# Altium PCB PCB1.PcbDoc
Units mil, origin at the board's own origin, x right, y up, seen from the top; angles counter-clockwise.
Board outline 6000 x 4000 mil, 2 copper layers (Top Layer, Bottom Layer); 71 components, 53 nets, 274 pads, 237 vias.
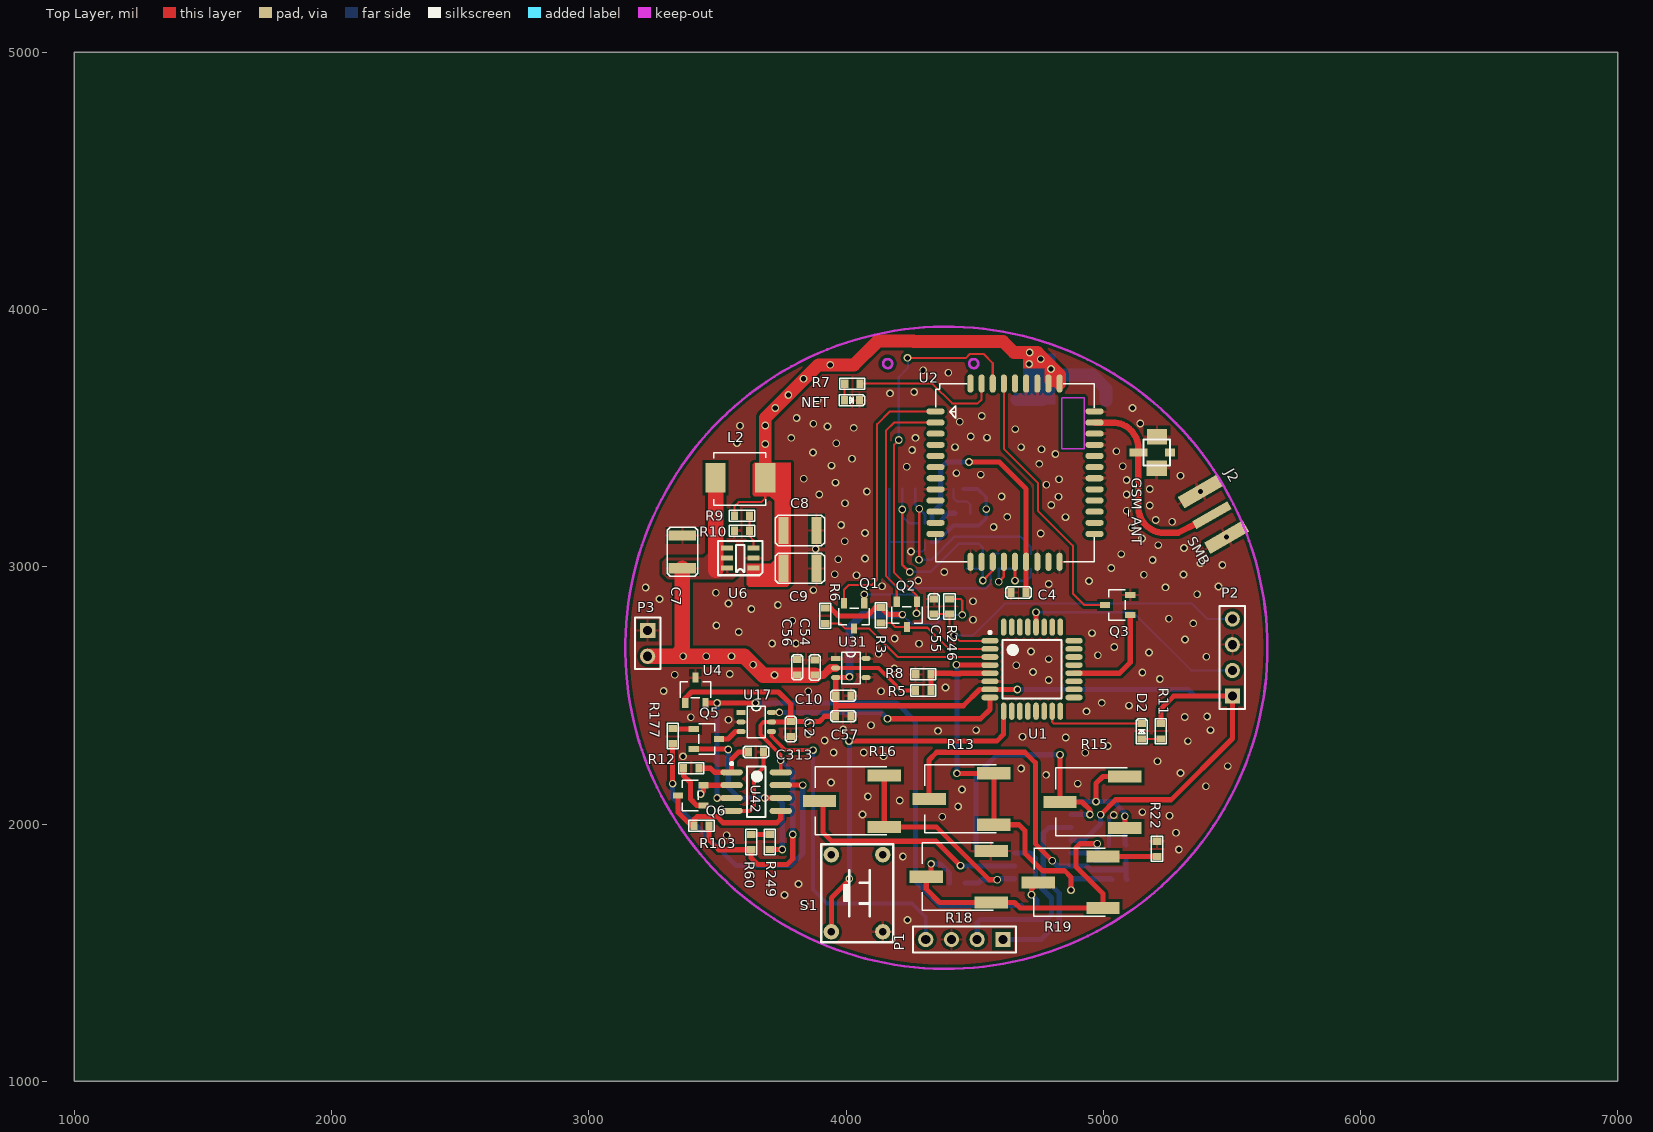
[diagram p0: Top Layer view]
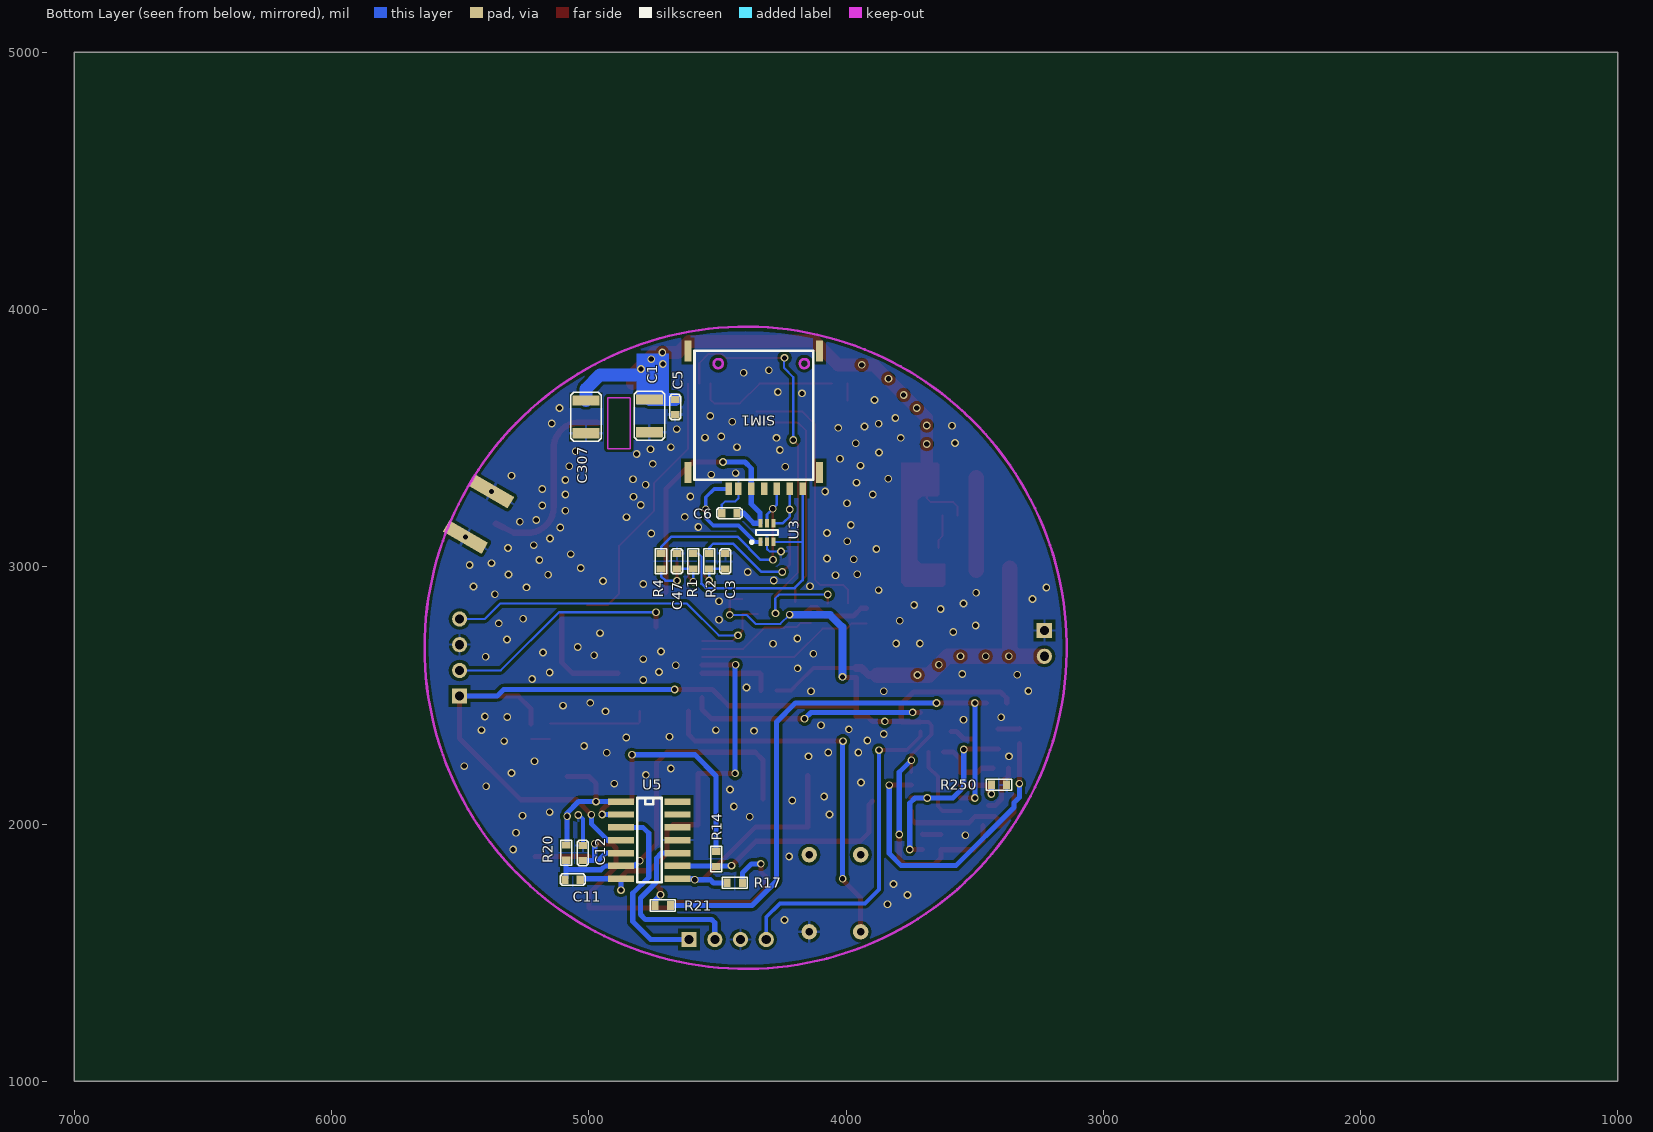
[diagram p1: Bottom Layer view, seen from below]

## Layer stack, top to bottom
Top Layer: signal copper 1.4
Dielectric: dielectric 12.6, FR-4, Dk 4.8
Bottom Layer: signal copper 1.4

## Board outline
1000,1000 7000,1000 7000,5000 1000,5000

## Design rules (kind name [scope] priority, off if disabled: settings)
Clearance [InPoly] p1: gap=12
Clearance Clearance_1 [All] p2: gap=10
PolygonConnect [IsVia] p1: connectstyle=Direct reliefconductorwidth=10 reliefentries=4 polygonreliefangle="90 Angle"
RoutingVias [All] p1: holewidth=28 width=50 viastyle="Through Hole" minholewidth=28 minwidth=50 maxholewidth=28 maxwidth=50
SilkscreenOverComponentPads [All] p1: minsilkscreentomaskgap=10
SolderMaskExpansion [All] p1: expansion=4
Width [All] p1: maxlimit=200 minlimit=5 preferedwidth=10
27 further rules are at their usual default settings.

## Classes and differential pairs
component class GPRS: C1 C3 C4 C5 C6 C47 C307 GSM_ANT J2 NET Q1 Q2 Q3 R1 R2 R3 R4 R6 R7 SIM1 U2 U3
component class MCU: C55 D2 P2 R5 R8 R11 R246 S1 U1
component class power: C2 C7 C8 C9 C10 C11 C12 C54 C56 C57 C313 L2 P1 P3 Q5 Q6 R9 R10 R12 R13 R14 R15 R16 R17 R18 R19 R20 R21 R22 R60 R103 R177 R249 R250 U4 U5 U6 U17 U31 U42

## Components (designator, comment, footprint, x,y, rotation, side; value= is the part's Value field where it differs from the comment)
C1 "47uF/10V" 1210C 4764,3523 r90 bottom
C2 "0.1uF" 0603C 3785,2399 r270 top
C3 "33pF/10V" 0603C 4469,2991.94 r90 bottom
C4 "220nF/10V" 0603C 4641,2900 r0 top
C5 "0.1uF/10V" 0603C 4664,3650 r270 bottom
C6 "33pF/10V" 0603C 4483,3208 r180 bottom
C7 "47uF/10V" 1210C 3364,3122 r270 top
C8 "47uF/10V" 1210C 3885,3141 r180 top
C9 "47uF/10V" 1210C 3885,2994 r180 top
C10 "0.1uF/10V" 0603C 3960,2499 r0 top
C11 "0.1uF" 0603C 5092,1784 r180 bottom
C12 "0.1uF" 0603C 5023,1917 r270 bottom
C47 "33pF/10V" 0603C 4657,2992 r90 bottom
C54 "0.1uF/10V" 0603C 3878,2579 r90 top
C55 "0.1uF/10V" 0603C 4341.35,2816 r90 top
C56 "10uF/10V" 0603C 3811,2639 r270 top
C57 "10uF/10V" 0603C 4019,2419 r180 top
C307 "47uF/10V" 1210C 5011,3519 r90 bottom
C313 "0.1uF" 0603C 3620,2280 r0 top
D2 "LED0" 0603LED 5150,2331 r90 top
GSM_ANT "IPX" IPX 5209,3495 r90 top
J2 "SMB" "SMA END LAUNCH JACK RECEPTACLE SHORT" 5422,3200 r300 top
L2 "IHLP-2020ABER4R7M01" IHLP2020 3686,3346 r180 top
NET "LED" 0603LED 3994,3647 r0 top
P1 "Header 4" HDR1X4 4610,1551 r180 top
P2 "Header 4" HDR1X4 5502,2497 r90 top
P3 "Header 2" HDR1X2 3229,2752 r270 top
Q1 "SI2306" SOT23-3 4071,2858 r90 top
Q2 "SI2306" SOT23-3 4276,2864 r90 top
Q3 "SI2306" SOT23-3 5105,2812 r0 top
Q5 "MMBT9015" SOT23-3 3408,2370 r180 top
Q6 "MMBT9013L" SOT23-3 3446,2072 r0 top
R1 "10R/5%" 0603R 4594,3051 r270 bottom
R2 "10R/5%" 0603R 4531.5,3051 r270 bottom
R3 "10K" 0603R 4136,2841 r270 top
R4 "10R/5%" 0603R 4719,3051 r270 bottom
R5 "10K" 0603R 4330,2519 r180 top
R6 "10K" 0603R 3920,2839 r270 top
R7 "1K" 0603r 3995,3712 r0 top
R8 "10K" 0603R 4271,2582 r0 top
R9 "51.1K/1%" 0603R 3625,3199 r180 top
R10 "10K/1%" 0603R 3566,3140 r0 top
R11 "1K" 0603R 5224,2390 r270 top
R12 "1K" 0603R 3428,2217 r180 top
R13 "200K" SMD_RESISTOR 4323,2097 r90 top
R14 "10K" 0603R 4505,1894 r270 bottom
R15 "200K" SMD_RESISTOR 4832,2085 r90 top
R16 "200K" SMD_RESISTOR 3897,2089 r90 top
R17 "100K" 0603R 4462,1771 r180 bottom
R18 "200K" SMD_RESISTOR 4312,1795 r90 top
R19 "200K" SMD_RESISTOR 4747,1773 r90 top
R20 "100K" 0603R 5088,1918 r270 bottom
R21 "100K" 0603R 4683,1683 r0 bottom
R22 "100K" 0603R 5209,1874 r90 top
R60 "100/1%" 0603R 3631,1900 r90 top
R103 "10K/1%" 0603R 3409,1993 r0 top
R177 "1K" 0603R 3326,2312 r90 top
R246 "10K" 0603R 4402.35,2816 r90 top
R249 "1.21K/1.25K/1%" 0603R 3703,1960 r270 top
R250 "10K/1%" 0603R 3376,2152 r0 bottom
S1 "SW-PB" key 3943,1581 r0 top
SIM1 "nano sim" "Nano SIM" 4456,3303 r0 bottom
U1 "STM8L151G4U6" QFP80P900X900X245-32N 4723,2602 r0 top
U2 "SIM800C" SIM800C 4348,3604 r0 top
U3 "SMF05C" SC70-6L 4307,3133 r90 bottom
U4 "REF3012AIDBZR" SOT23-3 3375,2471 r270 top
U5 "max4164" SO-14 4875,2087 r180 bottom
U6 "SS6640STR" SOT-23-6 3589,3034 r180 top
U17 "SN74LVC1G3157DBVR" SOT23-6(DBV) 3592,2434 r0 top
U31 "TLV70430DBVT" SOT23-5(DBV) 3960,2644 r0 top
U42 "LM2904AVQDR" SOP127P600-8N 3651,2126 r0 top

## Footprints (in the part's own frame and the unit in brackets; to place one, negate y for a bottom-side part, rotate by r counter-clockwise, add the part's x,y. Pads: shape width x height; smd on the part's side, far side on the other; paste and mask are expansions set on the pad)
0603C [mm]
  rect 0.7x0.85 smd: 1(0,0) 2(1.5,0)
  silkscreen extent -0.5,-0.55 2,0.55
0603LED [mm]
  rect 0.7x0.85 smd: 1(0,0) 2(1.5,0)
  silkscreen extent -0.5,-0.55 2,0.55
0603R [mm]
  rect 0.7x0.85 smd: 1(0,0) 2(1.5,0)
  silkscreen extent -0.5,-0.55 2,0.55
0603r [mm]
  rect 0.7x0.85 smd: 1(0,0) 2(1.5,0)
  silkscreen extent -0.5,-0.55 2,0.55
1210C [mm]
  rect 1x2.7 smd: 1(0,0) 2(3.25,0)
  silkscreen extent -0.8,-1.5 4.05,1.5
HDR1X2 [mm] "Connector; Header; 2 Position"
  rect 1.5x1.5 hole 0.9: 1(0,0)
  round 1.5 hole 0.9: 2(2.54,0)
  silkscreen extent -1.27,-1.27 3.81,1.27
HDR1X4 [mm] "Connector; Header; 4 Position"
  rect 1.5x1.5 hole 0.9: 1(0,0)
  round 1.5 hole 0.9: 2(2.54,0) 3(5.08,0) 4(7.62,0)
  silkscreen extent -1.27,-1.27 8.89,1.27
IHLP2020 [mm]
  rect 2x2.9 smd: 1(0,0) 2(4.9,0)
  silkscreen extent -0.07,-2.46 5.11,2.72
IPX [mil]
  rect 60x78.74 smd: 1(10.36,0) 3(-112,1)
  rect 31.5x70 smd: 2(-51,72.36)
  rect 31.5x39.37 smd: ""(-51,-50)
  silkscreen extent -102,-50 0,52
key [mil]
  round 60 hole 30: 1(0,0) 2(200,0) 3(0,300) 4(200,300)
  silkscreen extent -40,-40 240,340
"Nano SIM" [mm]
  rect 0.7x2.1 smd: 0(-8.97,-13.615) 0(-8.97,-1.615) 0(4.02,-13.615) 0(4.02,-1.615)
  rect 0.65x1.23 smd: 1(-2.22,0) 2(-4.76,0) 3(-7.3,0) 5(-0.95,0) 6(-3.49,0) 7(-6.03,0) 8(0,0)
  Keep-Out Layer circle w0.254: c-7.47,-12.365 r0.45
  Keep-Out Layer circle w0.254: c1.03,-12.365 r0.45
  silkscreen extent -8.33,-13.64 3.38,-0.91
QFP80P900X900X245-32N [mm] "QFP, 32-Leads, Body 9.2x9.2mm (max), Pitch 0.80mm, IPC Medium Density"
  oval 1.7x0.55 smd: 1(-4.15,2.8) 2(-4.15,2) 3(-4.15,1.2) 4(-4.15,0.4) 5(-4.15,-0.4) 6(-4.15,-1.2) 7(-4.15,-2) 8(-4.15,-2.8) 17(4.15,-2.8) 18(4.15,-2) 19(4.15,-1.2) 20(4.15,-0.4) 21(4.15,0.4) 22(4.15,1.2) 23(4.15,2) 24(4.15,2.8)
  oval 0.55x1.7 smd: 9(-2.8,-4.15) 10(-2,-4.15) 11(-1.2,-4.15) 12(-0.4,-4.15) 13(0.4,-4.15) 14(1.2,-4.15) 15(2,-4.15) 16(2.8,-4.15) 25(2.8,4.15) 26(2,4.15) 27(1.2,4.15) 28(0.4,4.15) 29(-0.4,4.15) 30(-1.2,4.15) 31(-2,4.15) 32(-2.8,4.15)
  silkscreen extent -4.27,-2.9 2.9,3.75, body extent -3.5,-3.5 3.5,3.5, height 2.45
SC70-6L [mm]
  rect 0.85x0.4 smd: 1(-0.925,0.65) 2(-0.925,0) 3(-0.925,-0.65) 4(0.925,-0.65) 5(0.925,0) 6(0.925,0.65)
  silkscreen extent -1.09,-1.1 0.25,1.65
SIM800C [mm]
  oval 1.8x0.6 smd: 1(0,0) 2(0,-1.1) 3(0,-2.2) 4(0,-3.3) 5(0,-4.4) 6(0,-5.5) 7(0,-6.6) 8(0,-7.7) 9(0,-8.8) 10(0,-9.9) 11(0,-11) 12(0,-12.1) 22(15.7,-12.1) 23(15.7,-11) 24(15.7,-9.9) 25(15.7,-8.8) 26(15.7,-7.7) 27(15.7,-6.6) 28(15.7,-5.5) 29(15.7,-4.4) 30(15.7,-3.3) 31(15.7,-2.2) 32(15.7,-1.1) 33(15.7,0)
  oval 0.6x1.8 smd: 13(3.45,-14.85) 14(4.55,-14.85) 15(5.65,-14.85) 16(6.75,-14.85) 17(7.85,-14.85) 18(8.95,-14.85) 19(10.05,-14.85) 20(11.15,-14.85) 21(12.25,-14.85) 34(12.25,2.75) 35(11.15,2.75) 36(10.05,2.75) 37(8.95,2.75) 38(7.85,2.75) 39(6.75,2.75) 40(5.65,2.75) 41(4.55,2.75) 42(3.45,2.75)
  Keep-Out Layer lines w0.127: 12.471,1.372 12.471,-3.683 14.681,-3.683 14.681,1.346 12.522,1.346
  silkscreen extent 0,-14.86 15.7,2.74
"SMA END LAUNCH JACK RECEPTACLE SHORT" [mm] "SMA Connector - End Launch Jack Receptacle - Short"
  rrect10% 0.9x4 smd paste+0 mask+0.05: 1(0,0)
  rrect10% 1.3x4.4 hole 0.5 mask+0.05: 2(-2.6,0.2) 2(2.6,0.2)
  body extent -0.5,-2.05 0.5,2.05, height 8
SMD_RESISTOR [mm]
  rect 1.2x3.3 smd: 1(2.54,-6.4) 2(0,0) 3(-2.54,-6.4)
  silkscreen extent -3.33,-6.63 3.37,0.41
SO-14 [mil]
  rect 100x25 smd: 1(0,0) 2(0,-50) 3(0,-100) 4(0,-150) 5(0,-200) 6(0,-250) 7(0,-300) 8(220,-300) 9(220,-250) 10(220,-200) 11(220,-150) 12(220,-100) 13(220,-50) 14(220,0)
  silkscreen extent 63,-314 158,14
SOP127P600-8N [mm]
  oval 2.2x0.6 smd: 1(-2.425,1.905) 2(-2.425,0.635) 3(-2.425,-0.635) 4(-2.425,-1.905) 5(2.425,-1.905) 6(2.425,-0.635) 7(2.425,0.635) 8(2.425,1.905)
  silkscreen extent -2.55,-2.5 0.93,2.88
SOT23-3 [mm]
  rect 1x0.6 smd: 1(0,0) 2(0,2) 3(-2.5,1)
  silkscreen extent -2.1,-0.5 -0.5,2.5
SOT23-5(DBV) [mm]
  rect 0.9x0.5 smd: 1(0,0)
  oval 0.9x0.5 smd: 2(0,-0.95) 3(0,-1.9) 4(3,-1.9) 5(3,0)
  silkscreen extent 0.6,-2.5 2.4,0.6
SOT23-6(DBV) [mm]
  rect 0.9x0.5 smd: 1(0,0)
  oval 0.9x0.5 smd: 2(0,-0.95) 3(0,-1.9) 4(3,-1.9) 5(3,-0.95) 6(3,0)
  silkscreen extent 0.6,-2.5 2.4,0.6
SOT-23-6 [mm]
  rect 1.2x0.5 smd: 1(-1.3,1) 2(-1.3,0) 3(-1.3,-1) 4(1.3,-1) 5(1.3,0) 6(1.3,1)
  silkscreen extent -2.2,-1.7 2.2,1.7

## Part data
C1 C7 C8 C9 C307: library part C, "C"
C2 C11 C12 C313: library part CAP, "Capacitor"
C3 C4 C5 C6 C10 C47 C54 C55 C56 C57: library part Cap, "Capacitor"
D2: "Typical INFRARED GaAs LED"
GSM_ANT: library part IPEX, "IPEX座"
J2: "SMB Straight Connector"
L2: library part L, "L"
NET: library part LED2, "Typical RED, GREEN, YELLOW, AMBER GaAs LED"
P1 P2: "Header, 4-Pin"
P3: "Header, 2-Pin"
Q1 Q2 Q3: library part BUK92150-55A, "BUK92150-55A"
Q5: library part PNP
Q6: library part NPN
R1 R2 R3 R4 R6 R11: library part Res2, "Resistor"
R5 R8 R9 R10 R12 R14 R17 R20 R21 R22 R60 R103 R177 R246 R249 R250: library part R, "R"
R7: library part R
R13 R15 R16 R18 R19: library part RPot, "Potentiometer"
S1: "Switch"
U4: library part REF3012
U31: library part TPS76318
U42: library part LM2904D, "Dual Operational Amplifier"

## Via types
v1: diameter 30, hole 20, Top Layer to Bottom Layer, tented both sides, 237 vias

## Nets (pads, with @x,y where several pads share a name; then routed paths per layer and width w, separated by ;. In a path a pad name is that pad's centre, name@x,y a point inside that pad or via, vN(x,y) a via of type N, cw(c..) or ccw(c..) an arc to the next point about the centre after c; other vN are vias at no path point)
1.25V_REF1: R21.1 U4.2 U42.3 | length 2343.8
  Top Layer w20: U4.2 3498,2471 v1(3499,2470) v1(3648,2470) ; v1(3499,2101) U42.3
  Bottom Layer w20: v1(3499,2101) v1(3499,2470) ; v1(3648,2470) 4197,2470 4270,2397 4270,1778 4365,1683 R21.1
CURR_EN1: U1.8 U17.6 | length 921.2
  Top Layer w20: U17.6 v1(3741,2434) ; v1(4161,2409) 4523,2409 4559.61,2445.61 U1.8
  Bottom Layer w20: v1(3741,2434) 4136,2434 v1(4161,2409)
GND: C1.1 C2.2 C3.2 C4.1 C5.2 C6.1 C7.1 C8.1 C9.1 C10.2 C12.1 C47.2 C54.2 C55.2 C56.1 C57.1 C307.1 C313.2 GSM_ANT.1 GSM_ANT.3 J2.2 NET.2 P1.3 P2.3 P3.1 Q3.2 R8.1 R10.1 R18.1 R22.2 R250.1 S1.2 SIM1.5 U1.6 U2.8 U2.13 U2.19 U2.21 U2.27 U2.30 U2.31 U2.33 U2.36 U2.37 U3.2 U4.3 U5.11 U6.2 U17.2 U31.1 U31.4 U31.5 U42.4 | length 678.9
  Top Layer w15: U42.4 3625,2051 3643,2069 3643,2184 3679.06,2220.06 C313.2
  Bottom Layer w8: v1(4253,3059) 4297,3059 4307,3069 U3.2 ; SIM1.5 4418.6,3265.4 4430,3254 4470,3254 4483,3241 C6.1
  Bottom Layer w15: C12.1 5023,2020 5038,2035 v1(5041,2035)
  other v1: 4239,1627 3839,1688 3761,1724 3815,1767 4221,1874 5294,1901 3536,1956 5283,1966 4374,2028 5258,2032 4064,2037 5152,2046 4436,2068 4209,2091 4085,2107 4451,2134 5399,2147 4901,2157 3942,2161 4778,2191 5300,2198 4681,2216 5484,2225 5211,2244 3366,2263 4146,2263 4930,2277 3952,2278 4069,2278 5018,2303 5329,2322 3917,2325 4854,2336 4686,2339 3853,2350 4358,2362 4506,2365 5417,2365 3989,2368 4097,2384 3543,2405 3397,2415 5317,2416 5404,2418 4935,2438 5100,2460 4994,2471 3853,2516 4136,2516 3291,2517 4387,2531 4788,2560 5220,2564 3334,2580 3548,2583 5152,2589 4727,2591 4188,2605 4662,2617 4788,2641 5401,2650 4979,2656 4127,2662 5178,2667 4719,2671 5043,2688 4284,2701 3713,2702 3805,2702 5318,2717 4189,2721 4956,2742 3583,2746 3496,2772 5350,2780 3791,2790 4494,2794 5255,2798 3632,2836 3735,2851 3543,2857 4494,2866 3275,2875 5365,2893 3494,2899 3873,2909 3221,2919 5242,2920 5448,2923 4140,2924 4788,2933 4945,2945 4281,2947 4041,2967 5158,2969 5312,2970 3956,2971 4382,2980 5031,2995 5463,3007 5378,3014 5192,3026 3970,3029 4074,3032 5070,3049 3882,3069 5314,3073 5214,3084 3995,3099 5151,3110 4757,3129 4074,3131 5111,3153 4574,3155 3981,3162 5268,3175 5204,3182 4853,3193 4627,3194 5091,3218 5181,3238 4798,3240 3996,3247 4826,3272 4605,3273 3896,3281 5091,3281 4081,3293 5181,3302 4779,3319 3959,3327 5091,3337 4828,3340 3836,3342 5300,3354 4524,3358 4429,3364 4236,3389 5076,3391 3944,3393 4751,3400 4023,3420 4814,3438 3872,3444 5051,3449 4257,3454 4760,3457 4424,3465 4681,3465 3962,3480 3576,3481 3787,3501 4270,3501 4548,3502 4485,3506 4658,3535 4030,3540 3928,3545 3588,3548 3873,3556 5144,3557 4442,3564 3808,3578 4528,3586 5114,3617 3889,3648 4171,3674 4265,3679 4398,3754 4300,3764
KEY: U1.21
NetC11_1: C11.1 R13.2 R20.2 U5.6 | length 1380.7
  Top Layer w20: R13.2 4323,2249 4353,2279 4695,2279 4736,2238 4736,1923 v1(4802,1857)
  Bottom Layer w20: v1(4802,1857) 4822,1837 U5.6 4938,1837 4953,1822 5086,1822 5088,1824 ; R20.2 5088,1824 ; C11.1 5088,1788 5088,1824
NetC12_2: C12.2 R17.2 R18.2 R18.3 R19.3 U5.5 | length 1542
  Top Layer w20: v1(4331,1845) 4331,1814 R18.2 4312,1747 4364,1695 R18.3 4655,1695 4677,1673 R19.3 4998.97,1729.03 4894,1834 4894,1907 4910,1923 v1(4977,1923)
  Bottom Layer w20: v1(4331,1845) 4368,1845 4402.94,1810.06 R17.2 ; U5.5 4934,1887 4963.06,1857.94 4979,1857.94 ; v1(4977,1923) 4977,1859.94 4979,1857.94 ; C12.2 4979,1857.94
NetC313_1: C313.1 R12.1 U42.1 | length 261.5
  Top Layer w20: R12.1 3473,2217 3489,2201 U42.1 3555.53,2252.53 3583,2280 C313.1
NetD2_1: D2.1 R11.2 | length 74
  Top Layer w8: D2.1 5223.94,2331 R11.2
NetD2_2: D2.2 U1.15 | length 393.2
  Top Layer w8: U1.15 4801.74,2396.26 4807.94,2390.06 D2.2
NetGSM_ANT_2: GSM_ANT.2 J2.1 U2.32 | length 747.3
  Top Layer w25: U2.32 5036.64,3560.69 cw(c5036.64,3460.69) 5136.64,3460.69 GSM_ANT.2 5136.64,3232 ccw(c5236.64,3232) 5236.64,3132 5291,3132 J2.1@5362,3168
NetNET_1: NET.1 R7.1 | length 65.4
  Top Layer w8: NET.1 3995,3648 R7.1
NetQ5_1: Q5.1 R177.2 | length 82.4
  Top Layer w20: R177.2 3327.06,2370 Q5.1
NetQ5_2: Q5.2 R249.2 U42.6 | length 808.2
  Top Layer w20: Q5.2 3540.74,2291.26 v1(3542,2290) ; v1(3684,2101) U42.6 ; R249.2 v1(3752.06,1900.94)
  Bottom Layer w20: v1(3542,2290) 3542,2144 3585,2101 v1(3684,2101) 3732,2101 3752.06,2080.94 v1(3752.06,1900.94)
NetQ5_3: Q5.3 U17.3 | length 97.4
  Top Layer w20: Q5.3 3541.63,2330.63 3570.2,2359.2 U17.3
NetQ6_1: Q6.1 R12.2 | length 192.1
  Top Layer w20: R12.2 3368.94,2187.06 3395,2161 3395,2097 3420,2072 Q6.1
NetQ6_2: Q6.2 R250.2 U42.2 | length 183
  Top Layer w20: v1(3435.06,2116.94) 3446,2127.89 Q6.2 3555.27,2150.74 U42.2
  Bottom Layer w20: v1(3435.06,2116.94) R250.2
NetQ6_3: Q6.3 R103.1 U42.5 | length 563.1
  Top Layer w20: Q6.3 3347.57,2045.19 3399.77,1993 R103.1 3409,2017 3421.73,2029.73 3497.27,2029.73 3522,2005 3731,2005 3746.47,2020.47 U42.5
NetR1_1: R1.1 SIM1.3 U3.3 | length 1023.3
  Bottom Layer w8: 4168.6,3096 4169.18,3096.58 U3.3 ; 4562,2934.57 4562.23,2934.81 4562.23,3040.23 4573,3051 R1.1
  Bottom Layer w10: SIM1.3 4168.6,3096 4168.6,2948.4 4200,2917 4544.43,2917 4562,2934.57
NetR2_1: R2.1 SIM1.7 U3.4 | length 794.7
  Top Layer w10: v1(4218.6,3223) 4218.6,3009.4 v1(4248,2980)
  Bottom Layer w10: SIM1.7 v1(4218.6,3223) 4218.6,3196.4 4245.58,3169.42 U3.4 ; v1(4248,2980) 4329,2980 4439,3090 4516,3090 4531.5,3074.5 R2.1
NetR4_1: R4.1 SIM1.2 U3.5 | length 866.3
  Top Layer w10: v1@4284.7,3023.3 4284.7,3027 v1(4284.7,3225.3)
  Bottom Layer w10: SIM1.2 4268.6,3241.4 v1(4284.7,3225.3) 4307,3203 U3.5 ; v1(4284,3027) 4332,3027 4422,3117 4679,3117 4707,3089 4719,3077 R4.1
NetR7_2: R7.2 U2.41 | length 573.4
  Top Layer w8: R7.2 4336,3712 4413,3635 4512,3635 4527.13,3650.13 U2.41
NetR9_1: R9.1 R10.2 U6.3 | length 131.9
  Top Layer w8: R9.1 3625,3140.06 R10.2 3625.06,3118.94 3640.18,3103.82 U6.3
NetR14_1: R14.1 R15.2 U5.2 | length 1057.4
  Top Layer w20: v1(4832,2269) R15.2 4918,2085 4948,2055 v1(4948,2037)
  Bottom Layer w20: R14.1 4505,2187 4587,2269 v1(4832,2269) ; U5.2 v1(4948,2037)
NetR14_2: R14.2 R16.2 U5.9 | length 925.6
  Top Layer w20: R16.2 3910,2076 3910,1968 3945,1933 4350,1933 v1(4445,1838)
  Bottom Layer w20: v1(4445,1838) 4445.94,1837.06 4502,1837.06 4654.94,1837.06 U5.9
NetR15_1: R15.1 R15.3 R20.1 U5.1 | length 593
  Top Layer w20: v1(4972,2087) 4972,2158 4999,2185 R15.1 ; R15.3 v1(5083.97,2029.97)
  Bottom Layer w20: U5.1 5040,2087 5083.97,2043.03 v1(5083.97,2029.97) 5083.97,1922.03 R20.1
NetR16_1: R16.1 R16.3 R17.1 U5.8 | length 924
  Top Layer w20: R16.1 R16.3 4351,1989 4557,1783 v1(4588,1783)
  Bottom Layer w20: R17.1 4515,1771 4527,1783 v1(4588,1783) 4592,1787 U5.8
NetR19_1: R19.1 R22.1 | length 210.4
  Top Layer w20: R19.1 5208,1873 R22.1
NetR19_2: R19.2 R21.2 | length 109.5
  Top Layer w20: v1(4721,1725) 4721,1747 R19.2
  Bottom Layer w20: v1(4721,1725) 4742.06,1703.94 R21.2
NetR60_2: R60.2 R249.1 | length 72.4
  Top Layer w20: R60.2 3702.06,1959.06 R249.1
NetR177_1: R177.1 U42.7 | length 1206.3
  Top Layer w20: v1(3326,2157) R177.1 ; U42.7 v1(3832,2151)
  Bottom Layer w20: v1(3326,2157) 3326,2103.64 3346.95,2082.69 3346.95,2064.05 3573,1838 3785,1838 3832,1885 v1(3832,2151)
NetS1_1: S1.1 U1.9 | length 1467.1
  Top Layer w20: S1.1 3943,1712 v1@4013,1782 ; v1(4012,2322) 4586,2322 4612.76,2348.76 U1.9
  Bottom Layer w20: v1(4012,2322) 4013,2321 v1(4013,1787)
NetSIM1_8: SIM1.8 U3.1 | length 433.8
  Bottom Layer w15: U3.1 4353.58,3096.58 4418,3161 4516,3161 4545,3190 4545,3270 4512,3303 SIM1.8
  other v1: 4545,3224
OUT+: P1.2 U5.10 | length 702.1
  Bottom Layer w20: P1.2 4510,1616 4523,1629 4780,1629 4798.85,1647.85 4798.85,1685 4798.85,1712.15 4737,1774 4737,1867 4717,1887 U5.10
OUT-: P1.1 U5.3 | length 734.1
  Bottom Layer w20: P1.1 4759,1551 4828.85,1620.85 4828.85,1730.65 4767,1792.5 4767,1879.43 4767,1964 4790,1987 U5.3
P1: P1.4 U17.4 | length 1313.8
  Top Layer w15: U17.4 3710.11,2340.89 3764,2287 v1(3872,2287)
  Bottom Layer w15: v1(3872,2287) 3872,1745 3926,1691 4257,1691 4310,1638 P1.4
PWRKEY: Q3.3 U2.39 | length 1070.4
  Top Layer w8: U2.39 4613.75,3458.25 4746,3326 4746,3218 4882,3082 4882,2896 4926.63,2851.37 Q3.3
PWRKEY_IN: Q3.1 U1.20 | length 419.9
  Top Layer w20: U1.20 5063.25,2586.25 5105,2628 Q3.1
RST: C55.1 P2.4 R246.1 U1.1 | length 1458
  Top Layer w8: C55.1 R246.1 4402.35,2750.65 v1(4419.61,2733.39) 4440.76,2712.24 U1.1
  Bottom Layer w8: v1(4419.61,2733.39) 4495.39,2733.39 4619,2857 5344,2857 5404,2797 P2.4
RXD: Q1.3 R6.2 U1.3 | length 693.8
  Top Layer w8: R6.2 3977.06,2779.94 3997.43,2759.57 Q1.3 4090.43,2759.57 4200.76,2649.24 U1.3
SENSOR_OUT: C11.2 R13.1 R13.3 U1.4 U5.7 | length 1587.2
  Top Layer w20: v1(4429,2619) 4430.25,2617.75 U1.4 ; v1(4431,2197) R13.1 R13.3 4673,1997 4696,1974 4696,1886 4764,1818 4850,1818 4875,1793 v1(4875,1743)
  Bottom Layer w20: v1(4429,2619) 4431,2617 v1(4431,2197) ; v1(4875,1743) U5.7 5029.94,1787 C11.2
SIM800_VBAT: C1.2 C5.1 C8.2 C9.2 C307.2 L2.1 R9.2 U2.34 U2.35 U6.1 | length 2379
  Top Layer w8: R9.2 3565.94,3233.94 3583,3251 3670,3251 3686,3267 L2.1
  Top Layer w50: L2.1 3686,3578 3893,3785 4031,3785 4123,3877 4261.71,3877 4262.71,3876 4610,3876 4653,3833 4744,3833 v1@4797.28,3779.72 ; U2.35@4797.28,3722.57 v1@4797.28,3779.72 ; U2.34 4830.28,3746.72 v1@4797.28,3779.72
  Bottom Layer w50: C5.1 4763.05,3650 C1.2 4764,3707 4802,3745 4957,3745 5011,3691 C307.2
  other v1: 3686,3477 3686,3549 3724.91,3616.91 3775.91,3667.91 3835,3731 4797.28,3769 3939,3785 4712,3788 4757,3807 4714,3833
SIM_RX: Q2.2 U2.2 | length 888
  Top Layer w8: Q2.2 4197.26,2922.74 4155,2965 4155,3528 4187.69,3560.69 U2.2
SIM_TX: Q1.2 U2.1 | length 1049.8
  Top Layer w8: Q1.2 3992.26,2911.26 4010,2929 4100,2929 4121,2950 4121,3554 4171,3604 U2.1
SIMC_CLK: C47.1 R1.2 U2.16 | length 198.5
  Top Layer w10: v1(4594,2942) 4613.75,2961.75 U2.16
  Bottom Layer w10: v1(4594,2942) R1.2 4594.06,2992 C47.1
SIMC_DATA: C3.1 R2.2 U2.15 | length 195.9
  Top Layer w10: v1(4532,2947) 4570.44,2985.44 U2.15
  Bottom Layer w10: C3.1 R2.2 4531.5,2947.5 v1(4532,2947)
SIMC_RST: R4.2 U2.17 | length 171.2
  Top Layer w10: v1(4657.05,2946.05) U2.17
  Bottom Layer w10: v1(4657.05,2946.05) 4702.05,2946.05 4719,2963 R4.2
SWIM: P2.2 U1.28 | length 914.8
  Top Layer w20: U1.28 v1(4738.75,2823.25)
  Bottom Layer w8: v1(4738.75,2823.25) 5115.75,2823.25 5342,2597 P2.2
TXD: Q2.3 R3.2 U1.2 | length 465.5
  Top Layer w8: R3.2 4176.06,2781.94 4192.43,2765.57 Q2.3 4239.2,2763 4317,2763 4399.26,2680.74 U1.2
VBAT: C7.2 C54.1 C56.2 L2.2 P3.2 R5.2 U6.4 U6.5 U6.6 U31.2 | length 1831.8
  Top Layer w15: U31.2 4126.4,2606.6 4184,2549 4214,2519 R5.2
  Top Layer w30: C54.1 3912,2579 3939.6,2606.6 U31.2
  Top Layer w60: P3.2 3338,2652 ; C7.2 3364,2678 3338,2652 ; 3493.09,2986.91 L2.2 ; C54.1 3678,2579 3605,2652 3338,2652
  other v1: 3722,2579 3639,2619 3367,2652 3457,2652 3555,2652
VBAT_ADC: R5.1 R8.2 U1.5 | length 296.2
  Top Layer w20: R5.1 4330.06,2519.06 R8.2 4334.31,2586.25 4412.25,2586.25 4414.5,2584 4443.5,2584 4445.75,2586.25 U1.5
VCC_3V: C2.1 C10.1 C57.2 P2.1 R3.1 R6.1 R11.1 R60.1 R103.2 R246.2 U1.7 U4.1 U5.4 U17.5 U31.3 U42.8 | length 6123.8
  Top Layer w8: R246.2 4444.94,2875.05 4452,2868 v1(4452,2813)
  Top Layer w15: U17.5 3679.6,2396.6 3667,2384 3667,2348 3746.47,2268.53 U42.8
  Top Layer w20: U4.1 3375,2489 3399,2513 3738,2513 3785,2466 C2.1 ; R103.2 3468.06,1936.94 3505,1900 3577,1900 R60.1 3631,1869 3658,1842 3771,1842 3793,1864 v1(3793,1959) ; U17.5 3782.6,2396.6 C2.1 ; R6.1 3941,2839 3971,2809 4081.78,2809 4113.78,2841 R3.1 4163,2814 v1(4219,2814) ; C57.2 3917,2419 3897,2399 C2.1 ; 3960,2436 3960,2457 ; v1(4014,2572) 4011.2,2569.2 U31.3 C10.1 3960,2457 ; v1(4666.26,2523.26) U1.7 4519.26,2523.26 4455.73,2459.73 3962.73,2459.73 3960,2457 ; v1(4990,2036) 5048,2094 5162,2094 5264,2094 5502,2332 P2.1 5274,2497 5224,2447 R11.1
  Bottom Layer w8: v1(4219,2814) 4255,2778 4352,2778 4387,2813 v1(4452,2813)
  Bottom Layer w20: v1(3746,2248) 3793,2201 v1(3793,1959) ; v1(4666.26,2523.26) 5330.74,2523.26 5357,2497 P2.1 ; U5.4 4926,1937 4990,2001 v1(4990,2036)
  Bottom Layer w30: v1(4014,2572) 4014,2765.57 4062.43,2814 v1(4219,2814)
  other v1: 3849,2399
VCC_EXT: Q1.1 Q2.1 U2.40 | length 1788.3
  Top Layer w8: Q1.1 v1(4071,2892) ; v1(4205,3493) 4187,3475 4187,2977 4276,2888 Q2.1 4274,2862 v1(4274,2819) ; v1(4239,3812) 4240,3811 4464.8,3811 4481.04,3827.25 4534.75,3827.25 4570.44,3791.56 U2.40
  Bottom Layer w8: v1(4071,2892) 4260,2892 4275,2877 4275,2820 v1(4274,2819) ; v1(4205,3493) 4205,3737 4241,3773 v1@4241,3812
VSIM: C4.2 C6.2 SIM1.1 U2.18 U3.6 | length 1122.4
  Top Layer w20: v1(4478,3407) 4596,3407 4700.36,3302.64 U2.18 4700.36,2900.31 C4.2
  Bottom Layer w15: U3.6 U3.6@4334.87,3169.42
  Bottom Layer w20: C6.2 4397,3208 4358.42,3169.42 4334.87,3169.42 4334.87,3209.87 4368.6,3243.6 SIM1.1 4368.6,3382.6 4393,3407 v1(4478,3407)
pads on no net: GSM_ANT. S1.3 S1.4 SIM1.0 SIM1.6 U1.10 U1.11 U1.12 U1.13 U1.14 U1.16 U1.17 U1.18 U1.19 U1.22 U1.23 U1.24 U1.25 U1.26 U1.27 U1.29 U1.30 U1.31 U1.32 U2.3 U2.4 U2.5 U2.6 U2.7 U2.9 U2.10 U2.11 U2.12 U2.14 U2.20 U2.22 U2.23 U2.24 U2.25 U2.26 U2.28 U2.29 U2.38 U2.42 U5.12 U5.13 U5.14 U17.1

## Polygon pours and split planes (outlines as drawn)
GND on Top Layer "Mid-Layer 1-No Net" (solid, remove dead copper): 2976,4054 5105,4119 5840,2738 5519,1763 4264,1218 3158,1470 2778,2914 2996,4056
VBAT on Top Layer "Mid-Layer 1-No Net" (solid, remove dead copper): 3469.1,3093 3564.96,3093 3573,3085.18 3573,2978.88 3573,2963 3563.74,2954 3560.66,2951 3436.19,2951 3306.57,2951 3289.09,2968 3286,2971 3286,3016 3286,3020.06 3297.26,3031 3301.92,3035.53 3441.84,3035.53 3447.02,3035.53 3454.7,3043 3469.1,3057 3469.1,3093
GND on Bottom Layer "Mid-Layer 1-No Net" (solid, remove dead copper): 2970,4090 5099,4155 5834,2774 5513,1799 4258,1254 3152,1506 2772,2950 2990,4092

## Keep-outs
Keep-Out Layer:
  circle w10: c4390,2685 r1248.37

## Other copper
Top Layer:
  rectangle net SIM800_VBAT: 4688,3771 4775.09,3833
  region net SIM800_VBAT: 3615,3011 3615,2930 3622,2923 3772,2923 3786,2937 3786,3404 3643,3404 3638,3399 3638,3280 3643,3275 3704,3275 3723,3256 3723,3027 3707,3011
Bottom Layer:
  rectangle net SIM800_VBAT: 4689,3631 4814,3830

## Silkscreen, mask and mechanical layers (free items; w line width, h text height)
Mechanical 1:
  circle w10: c4390,2685 r1259.84